# Altium PCB HM-13-multiple.PcbDoc
Units mm, origin at the board's own origin, x right, y up, seen from the top; angles counter-clockwise.
Board outline 152.4 x 101.6 mm, 2 copper layers (Top Layer, Bottom Layer); 12 components, 8 nets, 41 pads, 26 vias.
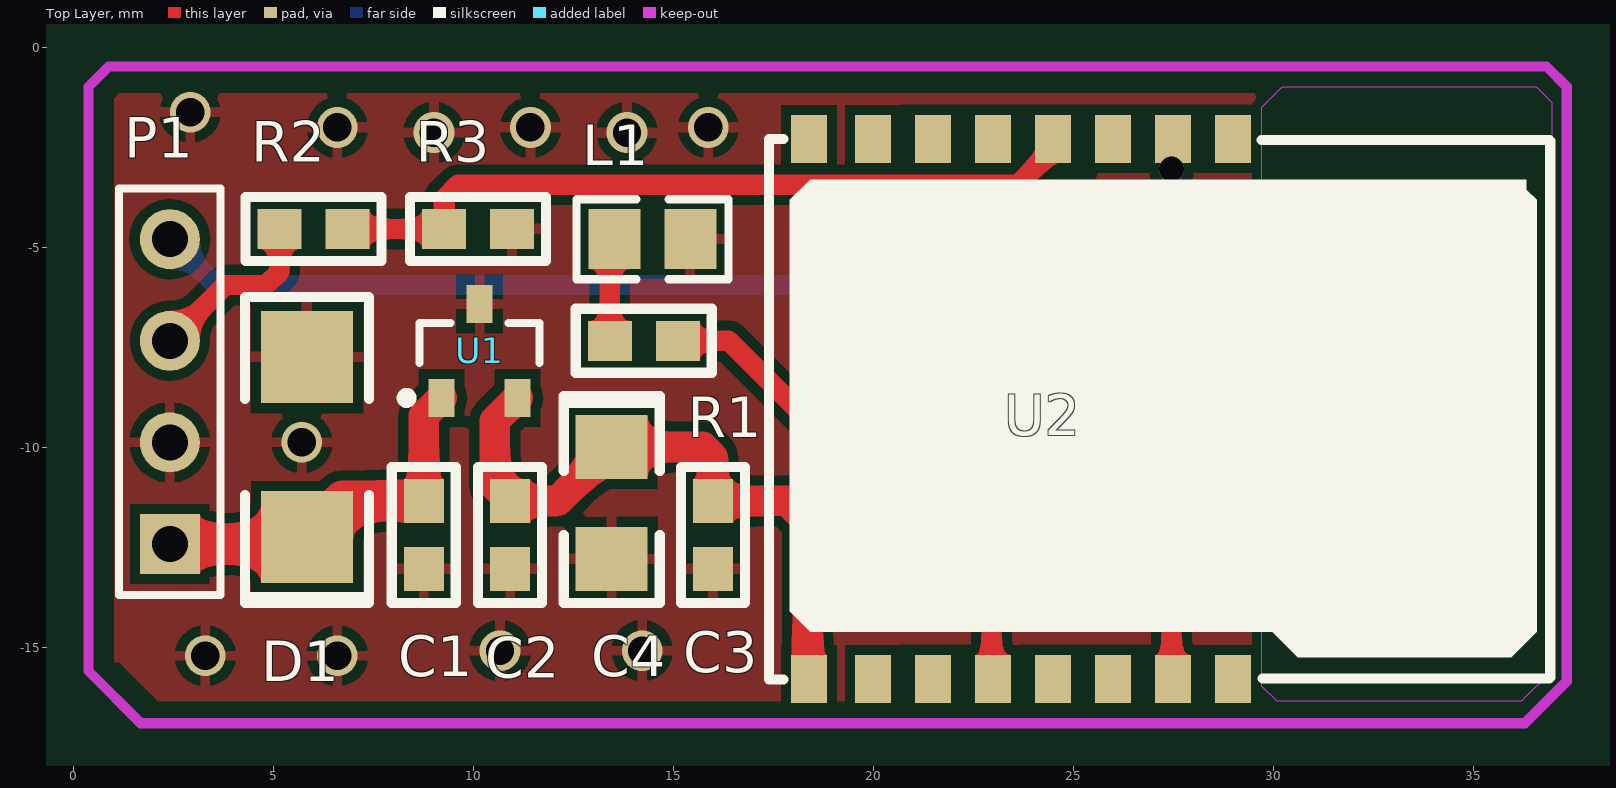
[diagram p0: Top Layer view]
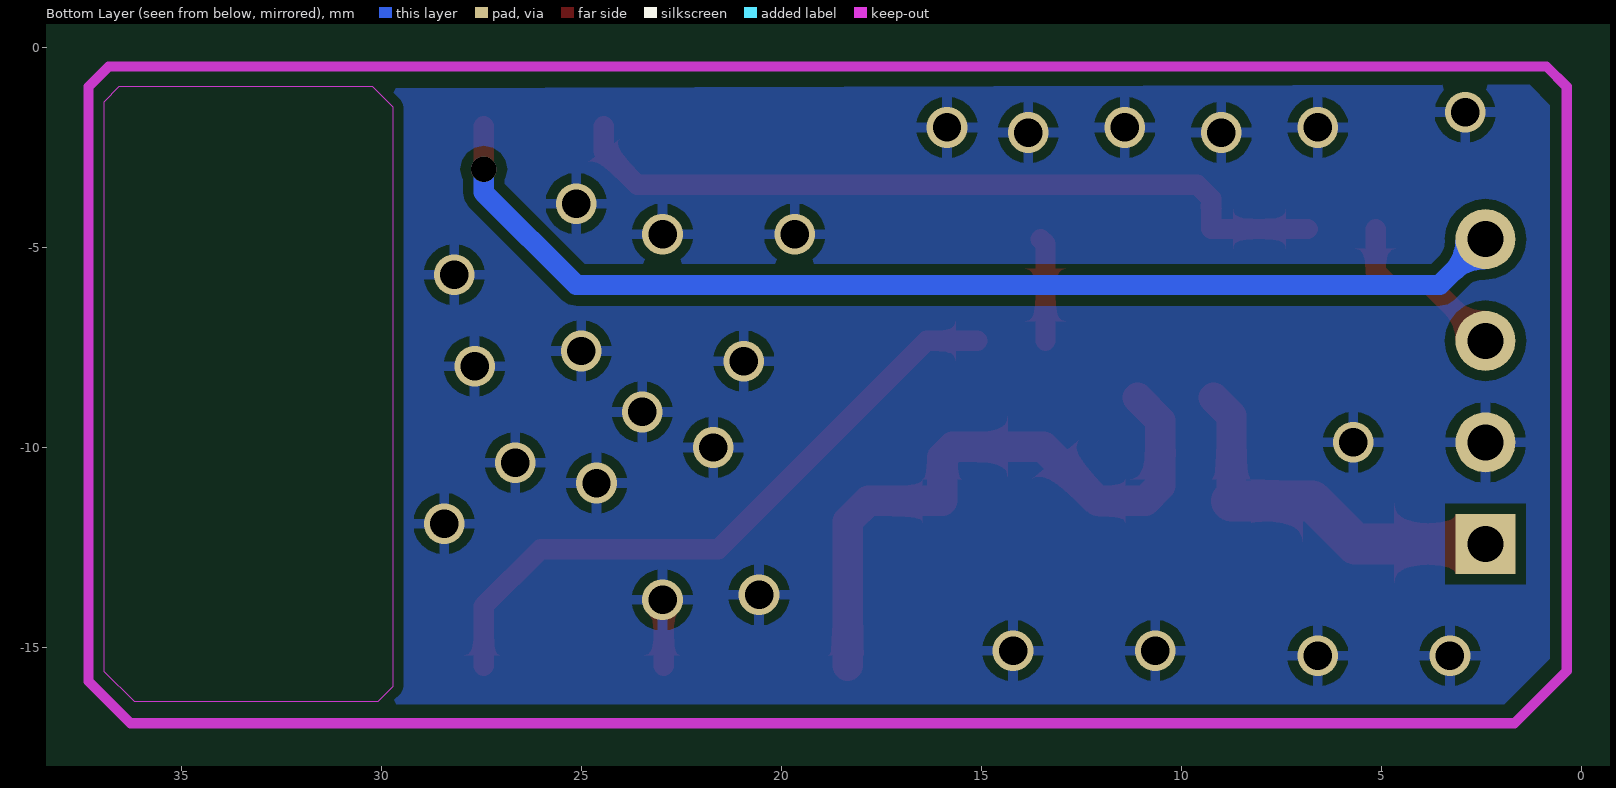
[diagram p1: Bottom Layer view, seen from below]

## Layer stack, top to bottom
Top Solder: solder mask 0.0102, Solder Resist, Dk 3.5
Top Layer: signal copper 0.0356
Dielectric 1: dielectric 0.32, FR-4, Dk 4.8
Bottom Layer: signal copper 0.0356
Bottom Solder: solder mask 0.0102, Solder Resist, Dk 3.5

## Board outline
-38.735,-78.74 113.665,-78.74 113.665,22.86 -38.735,22.86

## Design rules (kind name [scope] priority, off if disabled: settings)
Clearance [All] p1: gap=0.254
PolygonConnect [All] p1: connectstyle=Relief reliefconductorwidth=0.254 reliefentries=4 polygonreliefangle="90 Angle" airgapwidth=0.254
RoutingVias [All] p1: holewidth=0.711 width=1.016 viastyle="Through Hole" minholewidth=0.635 minwidth=0.381 maxholewidth=0.711 maxwidth=1.016
SolderMaskExpansion [All] p1: expansion=0.102
Width [All] p1: maxlimit=1.016 minlimit=0.254 preferedwidth=0.508
30 further rules are at their usual default settings.

## Components (designator, comment, footprint, x,y, rotation, side; value= is the part's Value field where it differs from the comment)
C1 "1uF" 0603 8.767,-12.185 r90 top
C2 "1uF" 0603 10.926,-12.185 r90 top
C3 "0.1uF" 0603 15.996,-12.185 r90 top
C4 "10uF/16V" 1206 13.456,-11.395 r270 top
D1 "TVS" DO214-AC 5.836,-9.985 r270 top
L1 "LED" 0805 14.472,-4.791 r0 top
P1 "Header 4" HDR1X4 2.407,-12.411 r90 top
R1 "470" 0603 14.257,-7.321 r180 top
R2 "2.2K" 0603 6.002,-4.527 r180 top
R3 "4.7K" 0603 10.115,-4.527 r180 top
U1 "AP7313" AP7313-33SAG-7 10.154,-7.585 r90 top
U2 "HM-13" HM-13 17.387,-2.286 r270 top

## Footprints (in the part's own frame and the unit in brackets; to place one, negate y for a bottom-side part, rotate by r counter-clockwise, add the part's x,y. Pads: shape width x height; smd on the part's side, far side on the other; paste and mask are expansions set on the pad)
0603 [mm]
  rect 1.1x1 smd: 1(-0.85,0.01) 2(0.85,0.01)
  silkscreen extent -1.7,-0.79 1.7,0.81
0805 [mm]
  rect 1.3x1.5 smd: 1(-0.95,0) 2(0.95,0)
  silkscreen extent -1.9,-1 1.9,1
1206 [mm]
  rect 1.6x1.8 smd: 1(-1.41,0) 2(1.39,0)
  silkscreen extent -2.68,-1.2 2.49,1.2
AP7313-33SAG-7 [mm] "SOT23, 3-Leads, Body 2.90x2.40mm, Pitch 0.95mm, IPC Medium Density"
  rect 0.95x0.65 smd: 1(-1.175,0.95) 2(-1.175,-0.95) 3(1.175,0)
  silkscreen extent -1.3,-1.5 0.7,1.95
DO214-AC [mm]
  rect 2.3x2.3 smd: 1(-2.25,0) 2(2.25,0)
  silkscreen extent -3.75,-1.55 3.9,1.55
HDR1X4 [mm] "Connector; Header; 4 Position"
  rect 1.5x1.5 hole 0.9: 1(0,0)
  round 1.5 hole 0.9: 2(2.54,0) 3(5.08,0) 4(7.62,0)
  silkscreen extent -1.27,-1.27 8.89,1.27
HM-13 [mm]
  rect 1.2x0.9 smd: 1(0,11.6) 2(0,10.1) 3(0,8.6) 4(0,7.1) 5(0,5.6) 6(0,4.1) 7(0,2.6) 8(0,1) 9(13.5,1) 10(13.5,2.6) 11(13.5,4.1) 12(13.5,5.6) 13(13.5,7.1) 14(13.5,8.6) 15(13.5,10.1) 16(13.5,11.6)
  silkscreen extent 0,0 13.51,19.53

## Part data
C1 C2 C3: library part Cap1, "ceramic"
C4: library part Cap3, "aluminum"
D1: library part 6V8A-TVS
P1: "Header, 4-Pin"
R1 R2 R3: library part Res
U1: library part AP7313-33SAG-7

## Via types
v1: diameter 1.016, hole 0.711, Top Layer to Bottom Layer, 25 vias
v2: diameter 0.635, hole 0.635, Top Layer to Bottom Layer, 1 vias

## Nets (pads, with @x,y where several pads share a name; then routed paths per layer and width w, separated by ;. In a path a pad name is that pad's centre, name@x,y a point inside that pad or via, vN(x,y) a via of type N, cw(c..) or ccw(c..) an arc to the next point about the centre after c; other vN are vias at no path point)
3.3V: C2.2 C3.2 C4.1 U1.2 U2.9 | length 16
  Top Layer w0.762: U1.2 10.535,-9.329 10.535,-10.954 C2.2 12.106,-11.335 C4.1 15.729,-9.985 15.986,-10.242 C3.2 17.841,-11.335 18.35,-11.844 U2.9@18.35,-15.459
5V: C1.2 D1.2 P1.1 U1.1 | length 9.6
  Top Layer w0.762: C1.2 8.757,-9.207 U1.1
  Top Layer w1.016: P1.1 5.66,-12.411 D1.2 6.736,-11.335 C1.2
GND: C1.1 C2.1 C3.1 C4.2 D1.1 L1.2 P1.2 R3.1 U1.3 U2.12 | length 1.7
  Top Layer w0.508: U2.12@22.95,-15.459 22.95,-13.839 v1(22.981,-13.808)
  other v1: 3.296,-15.205 6.598,-15.205 10.662,-15.078 14.218,-15.078 20.568,-13.681 28.442,-11.903 24.632,-10.887 26.664,-10.379 21.711,-9.998 5.709,-9.871 23.489,-9.109 27.68,-7.966 20.949,-7.839 25.013,-7.585 28.188,-5.68 19.679,-4.664 22.981,-4.664 25.14,-3.902 9.011,-2.124 13.837,-2.124 6.598,-1.997 11.424,-1.997 15.869,-1.997 2.915,-1.616
NetL1_1: L1.1 R1.2 | length 2.6
  Top Layer w0.508: R1.2 13.407,-4.906 L1.1
NetR1_1: R1.1 U2.15 | length 16.6
  Top Layer w0.508: R1.1 16.377,-7.331 21.584,-12.538 26.029,-12.538 27.45,-13.959 U2.15@27.45,-15.459
NetR2_1: R2.1 R3.2 U2.4 | length 19.5
  Top Layer w0.508: R2.1 R3.2 9.265,-3.775 9.611,-3.429 23.612,-3.429 24.45,-2.591 U2.4@24.45,-1.959
RX: P1.3 R2.2 | length 4.5
  Top Layer w0.508: P1.3 3.804,-5.934 4.82,-5.934 5.152,-5.602 R2.2
TX: P1.4 U2.2 | length 28.1
  Top Layer w0.508: v2(27.45,-3.037) U2.2@27.45,-1.959
  Bottom Layer w0.508: P1.4 3.55,-5.934 25.14,-5.934 27.45,-3.624 v2(27.45,-3.037)
pads on no net: U2.1 U2.3 U2.5 U2.6 U2.7 U2.8 U2.10 U2.11 U2.13 U2.14 U2.16

## Polygon pours and split planes (outlines as drawn)
GND on Bottom Layer "GND" (solid, remove dead copper, pour order 52): 30.257,-1.019 36.607,-1.019 36.988,-1.4 36.988,-15.624 36.226,-16.386 30.13,-16.386 30.094,-16.422 1.942,-16.422 0.926,-15.406 0.799,-15.279 0.799,-5.119 0.799,-1.436 1.307,-0.928
GND on Top Layer "GND" (solid, remove dead copper, pour order 54): 1.016,-1.27 1.143,-1.143 36.408,-1.143 36.57,-0.981 36.957,-1.367 36.957,-1.905 36.957,-15.58 36.189,-16.348 30.093,-16.348 2.124,-16.348 1.524,-15.748 1.143,-15.367 1.016,-15.367

## Keep-outs
Keep-Out Layer:
  region: 30.22,-0.981 36.57,-0.981 36.951,-1.362 36.951,-15.586 36.189,-16.348 30.093,-16.348 29.712,-15.967 29.712,-1.489
  lines w0.254: 37.332,-15.332 37.332,-0.981 36.824,-0.473 0.883,-0.473 0.375,-0.981 0.375,-15.586 1.681,-16.891 36.281,-16.891 37.332,-15.84 37.332,-15.078

## Silkscreen, mask and mechanical layers (free items; w line width, h text height)
Top Overlay:
  region: 17.907,-3.81 18.415,-3.302 36.322,-3.302 36.322,-3.556 36.576,-3.81 36.576,-14.605 35.941,-15.24 30.607,-15.24 29.972,-14.605 18.415,-14.605 17.907,-14.097

## Dimensions
0.756,4.861 to 37.713,4.861 on Top Overlay
-6.229,-0.092 to -5.431,-16.51 on Top Overlay